# Altium PCB Schematic.PcbDoc
Units mil, origin at the board's own origin, x right, y up, seen from the top; angles counter-clockwise.
Board outline 2040 x 2550 mil, 2 copper layers (Top Layer, Bottom Layer); 17 components, 11 nets, 49 pads, 4 vias.
Unrouted connection lines stored in the file: 14.
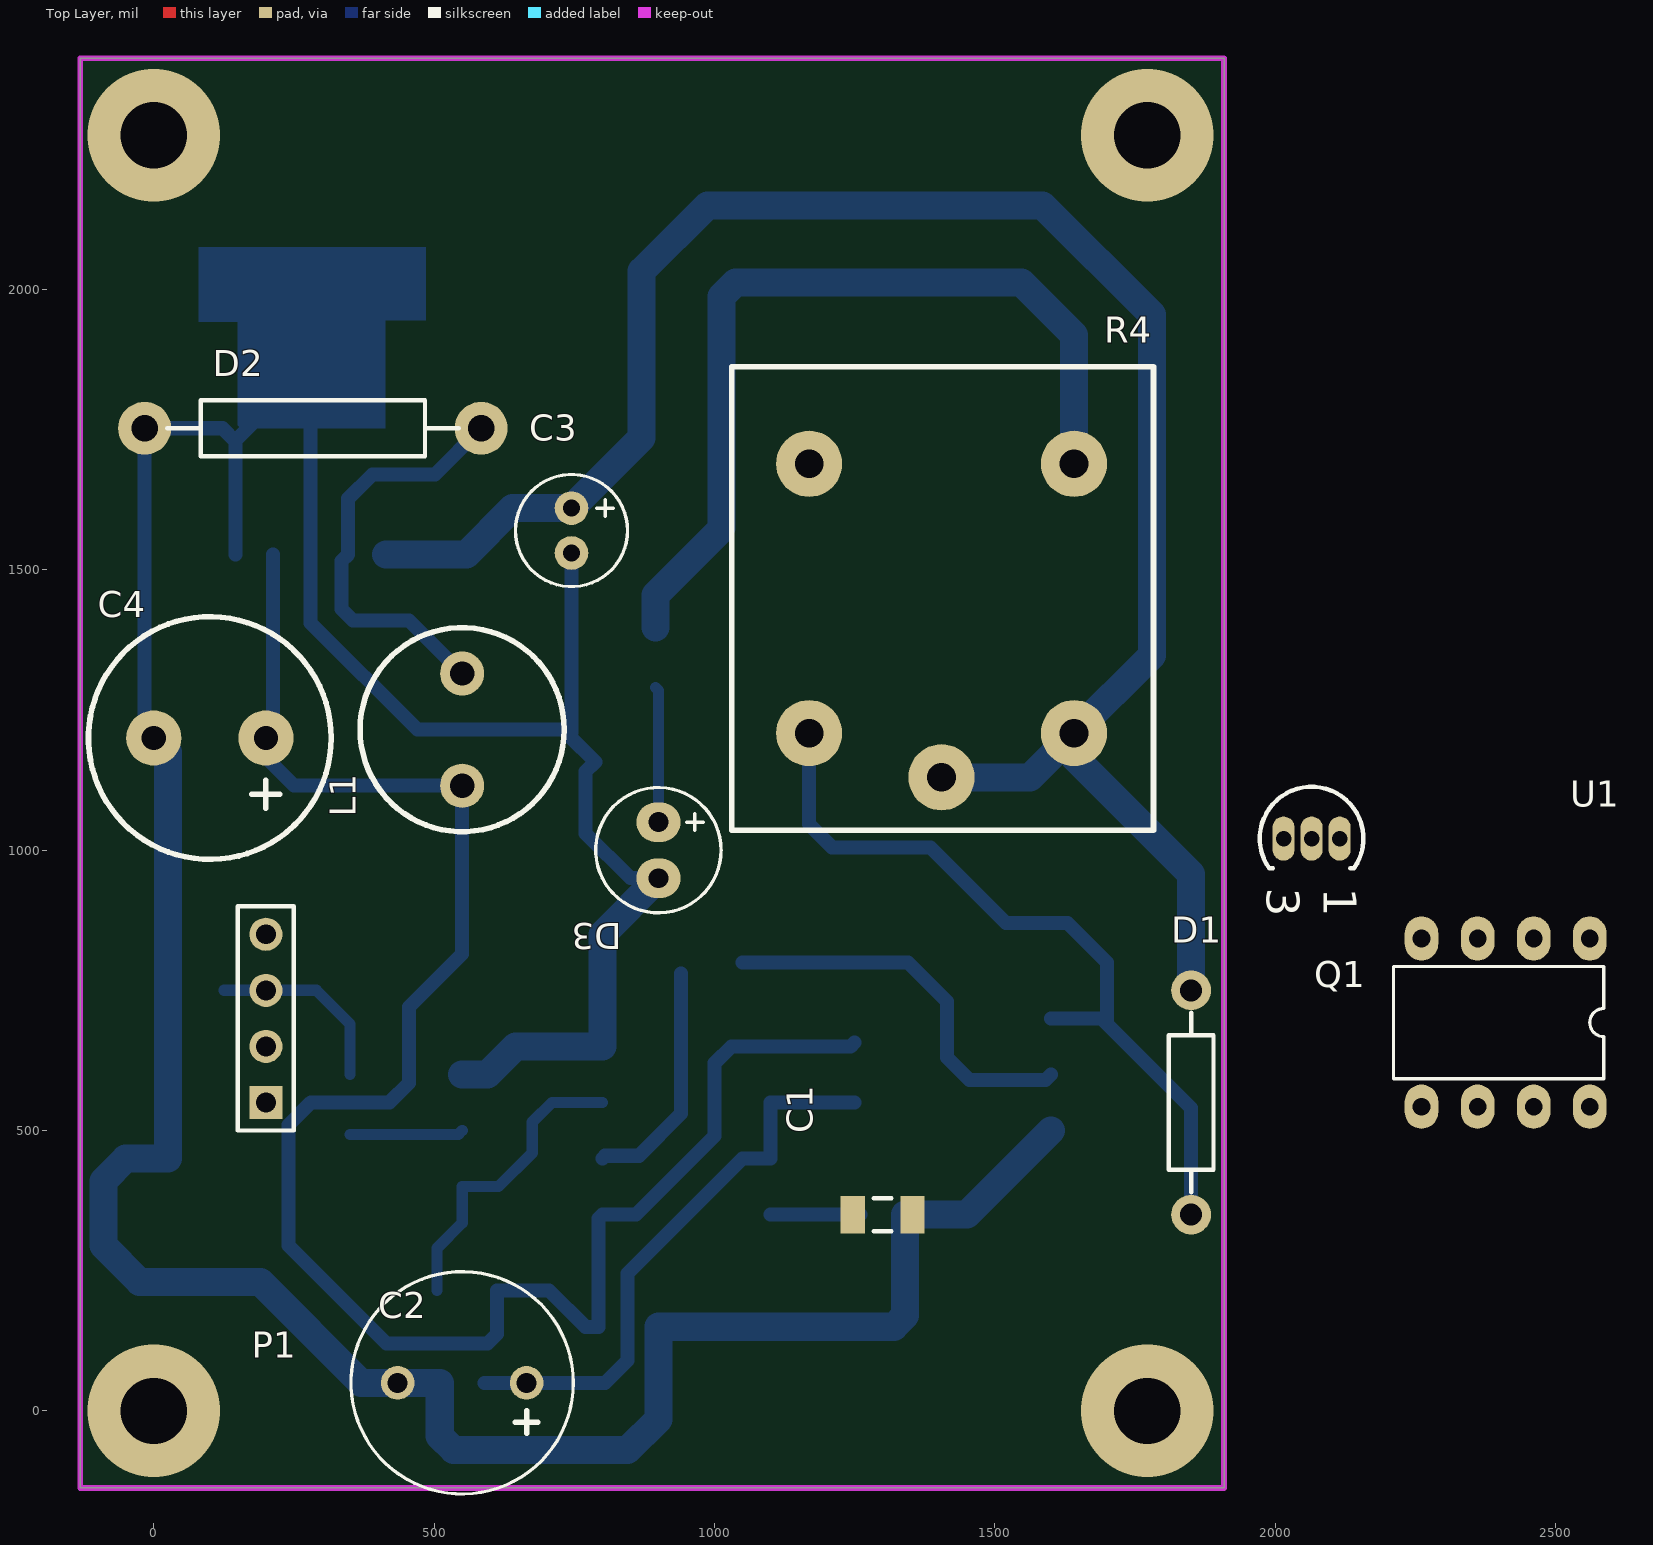
[diagram p0: Top Layer view]
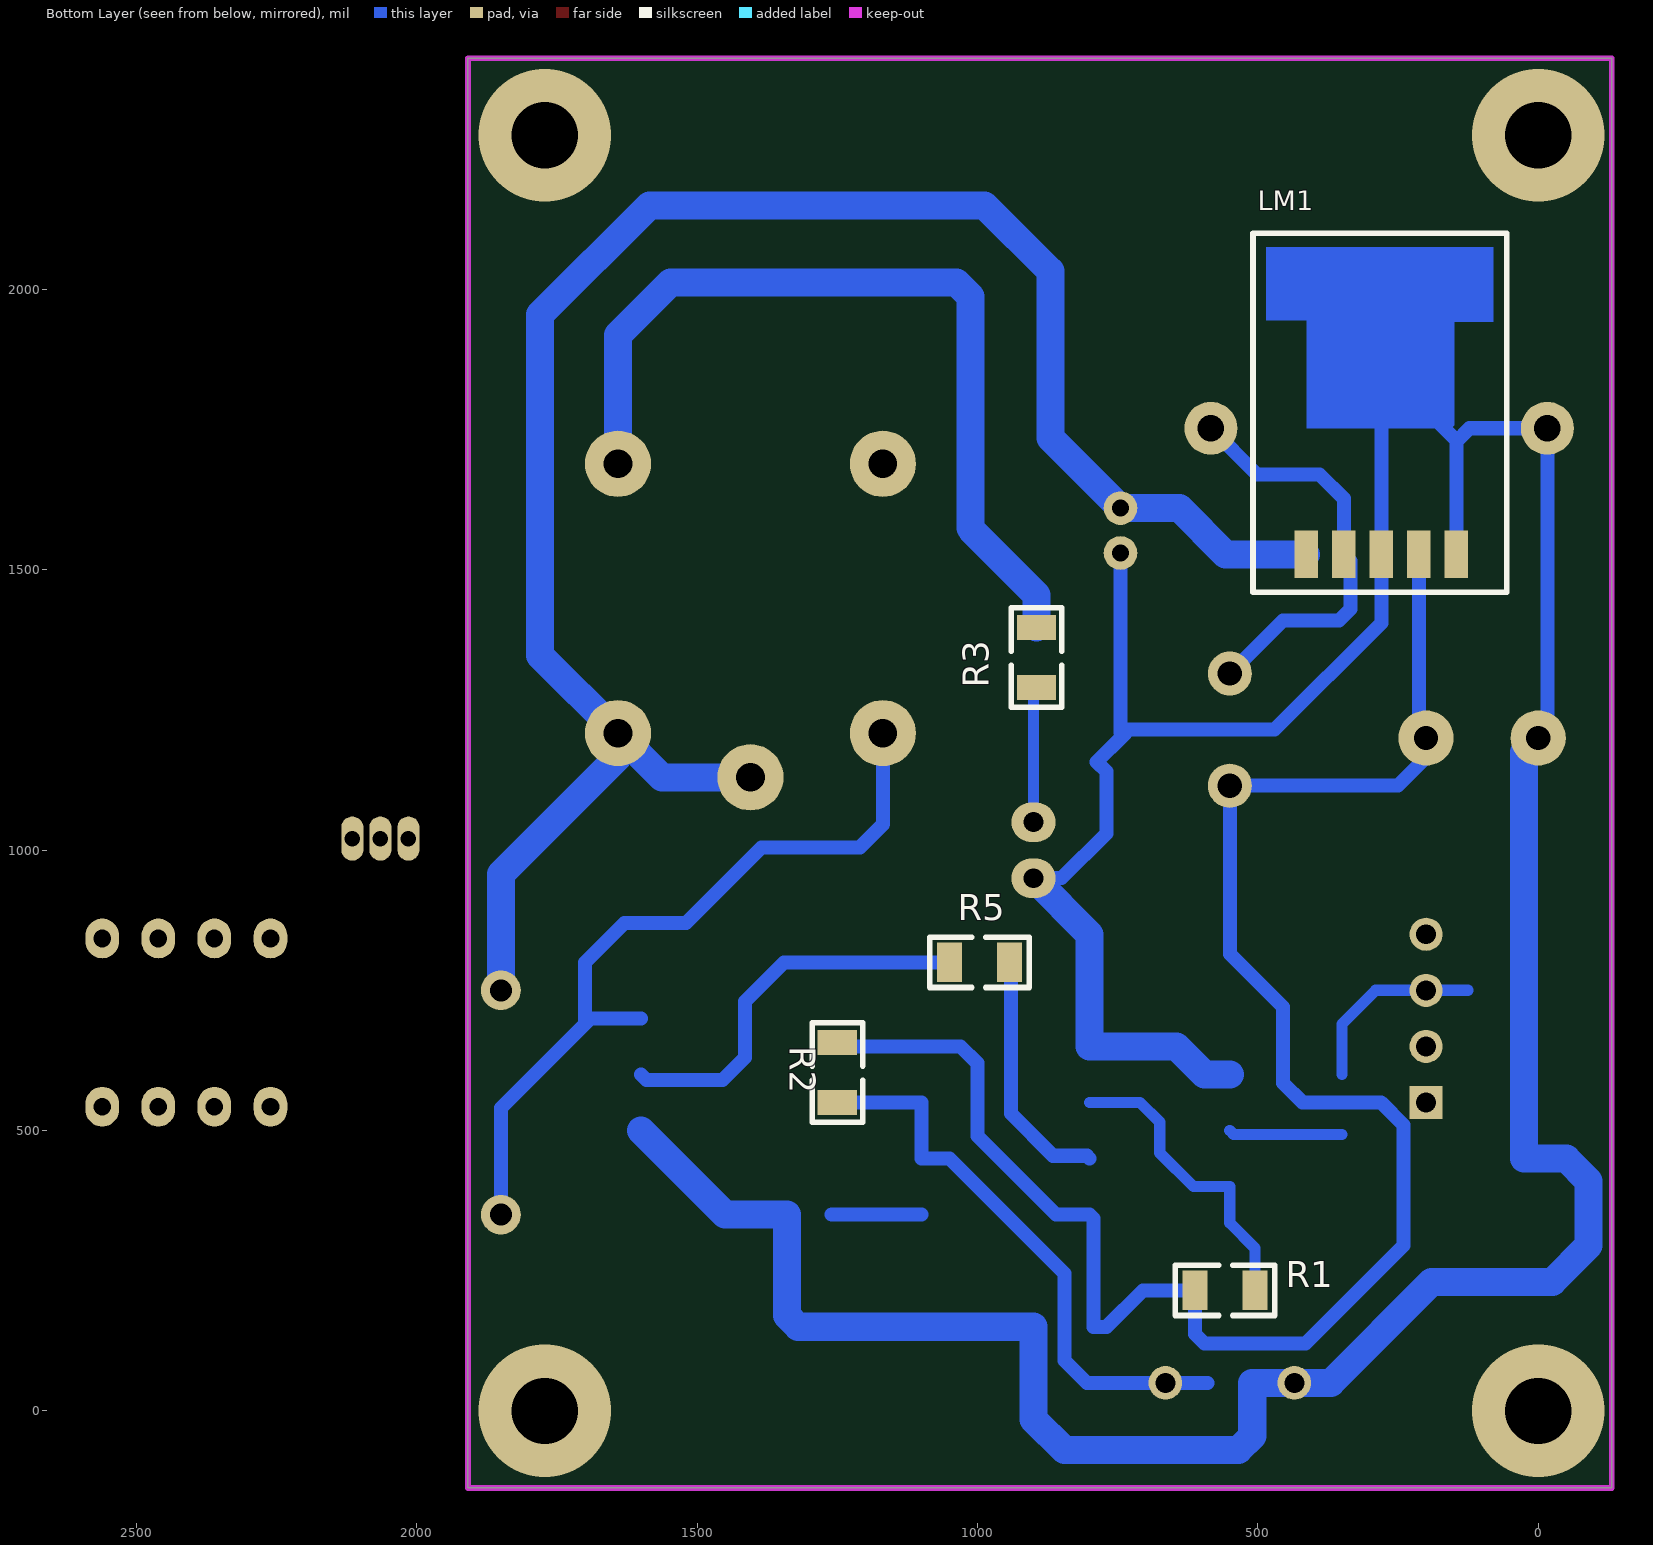
[diagram p1: Bottom Layer view, seen from below]

## Layer stack, top to bottom
Top Layer: signal copper 1.4
Dielectric: dielectric 12.6, FR-4, Dk 4.8
Bottom Layer: signal copper 1.4

## Board outline
-131.25,-137.5 1908.75,-137.5 1908.75,2412.5 -131.25,2412.5

## Design rules (kind name [scope] priority, off if disabled: settings)
Clearance [All] p1: gap=10
PolygonConnect [All] p1: connectstyle=Relief reliefconductorwidth=10 reliefentries=4 polygonreliefangle="90 Angle" airgapwidth=10
RoutingVias [All] p1: holewidth=28 width=50 viastyle="Through Hole" minholewidth=28 minwidth=50 maxholewidth=28 maxwidth=50
SolderMaskExpansion [All] p1: expansion=4
Width [All] p1: maxlimit=50 minlimit=10 preferedwidth=25
28 further rules are at their usual default settings.

## Components (designator, comment, footprint, x,y, rotation, side; value= is the part's Value field where it differs from the comment)
C1 "Cap Semi" C1206 1300,350 r0 top
C2 "Cap Pol1" "Polar Cap 9 mm" 550,50 r180 top
C3 "Cap Pol1" "polar Cap" 745,1570 r270 top
C4 "Cap Pol1" 12mm 100,1200 r180 top
D1 "1N5408" AXIAL-0.4 1850,550 r90 top
D2 "1N5408" AXIAL-0.6 283.75,1752.5 r0 top
D3 "LED0" LED 900,1050 r270 top
L1 "Inductor" WireWound 550,1215 r270 top
LM1 "LM2576" LM2576 146.25,1525 r270 bottom
P1 "Header 4" HDR1X4 200,550 r90 top
Q1 "BC547" TO-92 2064.96,1020.67 r270 top
R1 "Res1" 1206 505,215 r90 bottom
R2 "Res1" 1206 1250,550 r180 bottom
R3 "Res1" 1206 895,1290 r180 bottom
R4 "Relay_G5LE" G5LE_relay 1405,1130 r90 top
R5 "Res1" 1206 1050,800 r270 bottom
U1 "ATTINY85" DIP8 2561.02,842.52 r270 top

## Footprints (in the part's own frame and the unit in brackets; to place one, negate y for a bottom-side part, rotate by r counter-clockwise, add the part's x,y. Pads: shape width x height; smd on the part's side, far side on the other; paste and mask are expansions set on the pad)
12mm [mm] "12mm"
  round 2.5 hole 1.1: 1(-2.54,0) 2(2.54,0)
  silkscreen extent -5.5,-5.5 5.5,5.5
1206 [mil] "1206"
  rect 70x45 smd: 1(0,0) 2(0,107)
  silkscreen extent -45,-35 45,142
AXIAL-0.4 [mm] "Axial Device, Thru-Hole; 2 Leads; 0.4 in Pin Spacing"
  round 1.8 hole 1: 1(-5.08,0) 2(5.08,0)
  silkscreen extent -4.06,-1.02 4.06,1.02
AXIAL-0.6 [mm] "Axial Device, Thru-Hole; 2 Leads; 0.6 in Pin Spacing"
  round 2.4 hole 1.2: 1(-7.62,0) 2(7.62,0)
  silkscreen extent -6.6,-1.27 6.6,1.27
C1206 [mm] "Chip Capacitor, Body 3.2x1.6mm, IPC High Density"
  rect 1.1x1.7 smd: 1(-1.35,0) 2(1.35,0)
  silkscreen extent -0.4,-0.75 0.4,0.75, body extent -1.7,-0.9 1.7,0.9, height 1.3
DIP8 [mm] "DIP8"
  oval 2x1.524 / inner oval 1.8x1.524 / far side oval 1.8x1.524 hole 0.8: 1(0,0) 2(0,-2.54) 3(0,-5.08) 4(0,-7.62) 5(7.62,-7.62) 6(7.62,-5.08) 7(7.62,-2.54) 8(7.62,0)
  silkscreen extent 1.27,-8.89 6.35,0.64
G5LE_relay [mm] "24 V Mechanical Relay"
  round 3 hole 1.3: 0(2,-6) 1(2,6) 2(0,0) 3(14.2,6) 4(14.2,-6)
  silkscreen extent -2.4,-9.6 18.6,9.5
HDR1X4 [mm] "Connector; Header; 4 Position"
  rect 1.5x1.5 hole 0.9: 1(0,0)
  round 1.5 hole 0.9: 2(2.54,0) 3(5.08,0) 4(7.62,0)
  silkscreen extent -1.27,-1.27 8.89,1.27
LED [mm] "LED"
  oval 1.8x2 hole 0.9: 1(0,0) 2(2.54,0)
  silkscreen extent -1.57,-2.84 4.11,2.84
LM2576 [mm] "LM2576"
  rect 2.16x1.07 smd: 1(-0.064,-6.794) 2(-0.064,-5.095) 3(-0.064,-3.394) 4(-0.064,-1.695) 5(-0.064,0.005)
  silkscreen extent -14.61,-9.21 1.65,2.29
"polar Cap" [mil] "5mm Body Polar Cap"
  round 60 hole 30: 1(-40,0) 2(40,0)
  silkscreen extent -100,-100 100,100
"Polar Cap 9 mm" [mil] "Polar Cap 9 mm"
  round 60 hole 35.43: 1(-115,0) 2(115,0)
  silkscreen extent -198,-198 198,198
TO-92 [mm] "TO, Flat Index; 3 In-Line, Axial Leads; Body Dia. 4.6mm; Leads 0.41 x 0.39 mm (max)"
  oval 2x1 hole 0.7: 1(0,1.27) 2(0,0) 3(0,-1.27)
  silkscreen extent -2.34,-2.34 1.35,2.34
WireWound [mm] "WireWound"
  round 2 hole 1.1: 1(-2.54,0) 2(2.54,0)
  silkscreen extent -4.62,-4.62 4.62,4.62

## Part data
C1: "Capacitor (Semiconductor SIM Model)"
C2 C3 C4: "Polarized Capacitor (Radial)"
D1 D2: library part "Diode 1N5408", "3 Amp Medium Power Silicon Rectifier Diode"
D3: "Typical INFRARED GaAs LED"
LM1: library part Component_1, "Switcher"
P1: "Header, 4-Pin"
Q1: library part 2N3904, "NPN General Purpose Amplifier"
R1 R2 R3 R5: "Resistor"
U1: library part NE555D, "Precision Timer"

## Via types
v1: diameter 236.22, hole 118.11, Top Layer to Bottom Layer, 4 vias

## Nets (pads, with @x,y where several pads share a name; then routed paths per layer and width w, separated by ;. In a path a pad name is that pad's centre, name@x,y a point inside that pad or via, vN(x,y) a via of type N, cw(c..) or ccw(c..) an arc to the next point about the centre after c; other vN are vias at no path point)
24V: C3.1 D1.2 LM1.1 P1.1 R4.0 R4.2 | length 3496.9
  Bottom Layer w50: LM1.1 557.5,1527.5 640,1610 C3.1 870,1735 870,2032.5 987.5,2150 1585,2150 1780,1955 1780,1347.52 R4.0 ; R4.2 1562.48,1130 R4.0 ; D1.2 1850,957.48 1641.22,1166.26 R4.0
"24V OUT": P1.2 R3.2 R4.4 | length 1540.8
  Bottom Layer w50: R3.2 895,1455 1010,1570 ; 1012.5,1575 1012.5,1987.5 1037.5,2012.5 1547.5,2012.5 1641.22,1918.78 R4.4
GND: C1.1 C2.2 C3.2 C4.2 D2.1 D3.2 LM1.3 LM1.5 P1.4 Q1.1 U1.4 | length 6611.5
  Bottom Layer w25: C4.2 -16.25,1216.25 D2.1 122.5,1752.5 146.03,1728.97 ; LM1.5 146.03,1728.97 ; 205,1790 146.03,1731.03 146.03,1728.97 ; 290,1805 279.89,1794.89 LM1.3 279.89,1405.11 470,1215 730,1215 740,1205 ; C3.2 745,1210 740,1205 ; D3.2 850,950 770,1030 770,1140 787.5,1157.5 740,1205
  Bottom Layer w50: C4.2 25,1175 25,750 25,650 25,550 25,450 -50,450 -90,410 -90,295 -25,230 190,230 370,50 510,50 510,-45 535,-70 845,-70 900,-15 900,150 1320,150 1340,170 1340,350 1450,350 1600,500 ; 550,600 595,600 645,650 800,650 800,850 D3.2
NetC1_2: C1.2 R1.1 U1.1 | length 548
  Bottom Layer w20: R1.1 505,290 550,335 550,400 615,400 675,460 675,515 710,550 800,550
NetD1_1: D1.1 Q1.3 R4.1 | length 1412
  Bottom Layer w25: R4.1 1168.78,1046.22 1210,1005 1385,1005 1520,870 1630,870 1700,800 1700,690 ; 1600,700 1690,700 1700,690 ; D1.1 1850,540 1700,690
NetD2_2: D2.2 L1.1 LM1.2 | length 753.3
  Bottom Layer w25: L1.1 455,1410 355,1410 335,1430 335,1515.68 LM1.2 346.82,1626.82 390,1670 501.25,1670 D2.2
NetD3_1: D3.1 R3.1 | length 242.1
  Bottom Layer w20: R3.1 900,1285 D3.1
NetQ1_2: Q1.2 R5.1 | length 699.7
  Bottom Layer w25: R5.1 1345,800 1415,730 1415,630 1455,590 1590,590 1600,600
"TO RELAY": R5.2 U1.6 | length 423.1
  Bottom Layer w25: 800,450 805,455 865,455 940,530 R5.2@940,780
TRIGGER: C2.1 P1.3 R2.1 U1.5 | length 1356.3
  Bottom Layer w20: 125,750 290,750 350,690 350,600
  Bottom Layer w25: 590,50 805,50 845,90 845,245 1050,450 1100,450 1100,550 R2.1
VCC: C4.1 L1.2 LM1.4 R1.2 R2.2 U1.8 | length 3362.7
  Bottom Layer w25: LM1.4 212.96,1212.96 C4.1 200,1165 250,1115 L1.2 550,815 455,720 455,585 420,550 280,550 240,510 240,295 415,120 595,120 612,137 R1.2 705,215 770,150 793,150 793,343 800,350 860,350 1000,490 1000,620 1030,650 1100,650 1243,650 R2.2
pads on no net: R4.3 U1.2 U1.3 U1.7
copper on no net: | length 362.9
  Bottom Layer w20: 350,493 543,493 550,500
  Bottom Layer w25: 1100,350 1260,350
  other v1: 0,0 1771.65,0 0,2275 1771.65,2275

## Keep-outs
Keep-Out Layer:
  the board outline again, w10

## Other copper
Bottom Layer:
  region net GND: 80,2075 80,1942.5 150,1942.5 150,1757.5 155,1752.5 412.5,1752.5 412.5,1945 485,1945 485,2075

## Text inside footprints (layer, text, board x,y; h text height)
Q1: Top Overlay "3" at 1984.84,933.11 h59.05 r270; Top Overlay "1" at 2087.01,933.11 h59.05 r270